# Altium PCB ADCS ARM EUTS.PcbDoc
Units mil, origin at the board's own origin, x right, y up, seen from the top; angles counter-clockwise.
Board outline 3757.87 x 3555.12 mil, 4 copper layers (Top Layer, Ground, Power, Bottom Layer), stack 64.6 mil thick; 56 components, 69 nets, 305 pads, 130 vias.
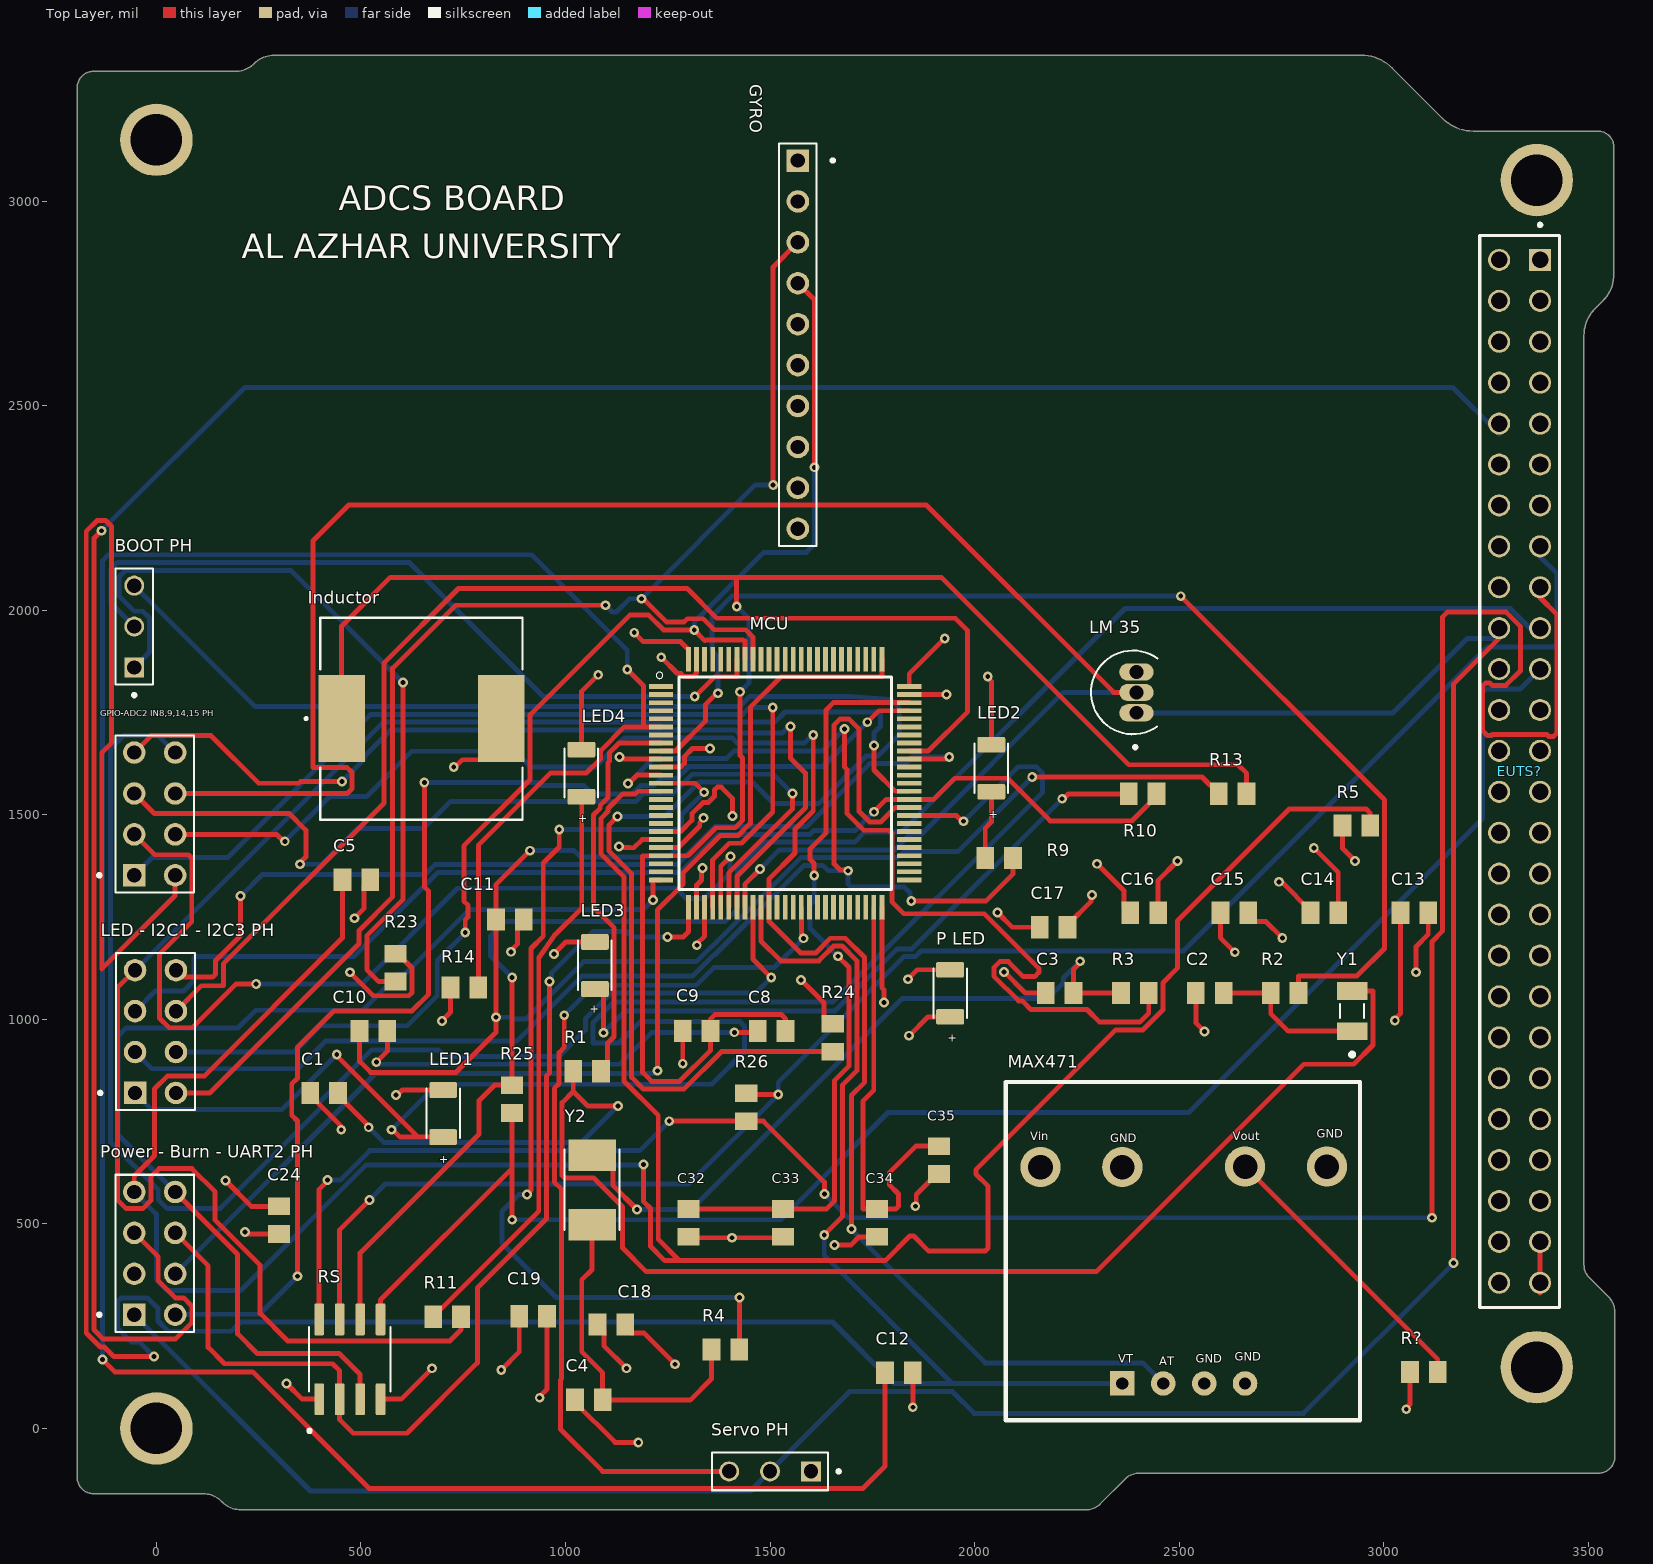
[diagram p0: Top Layer view]
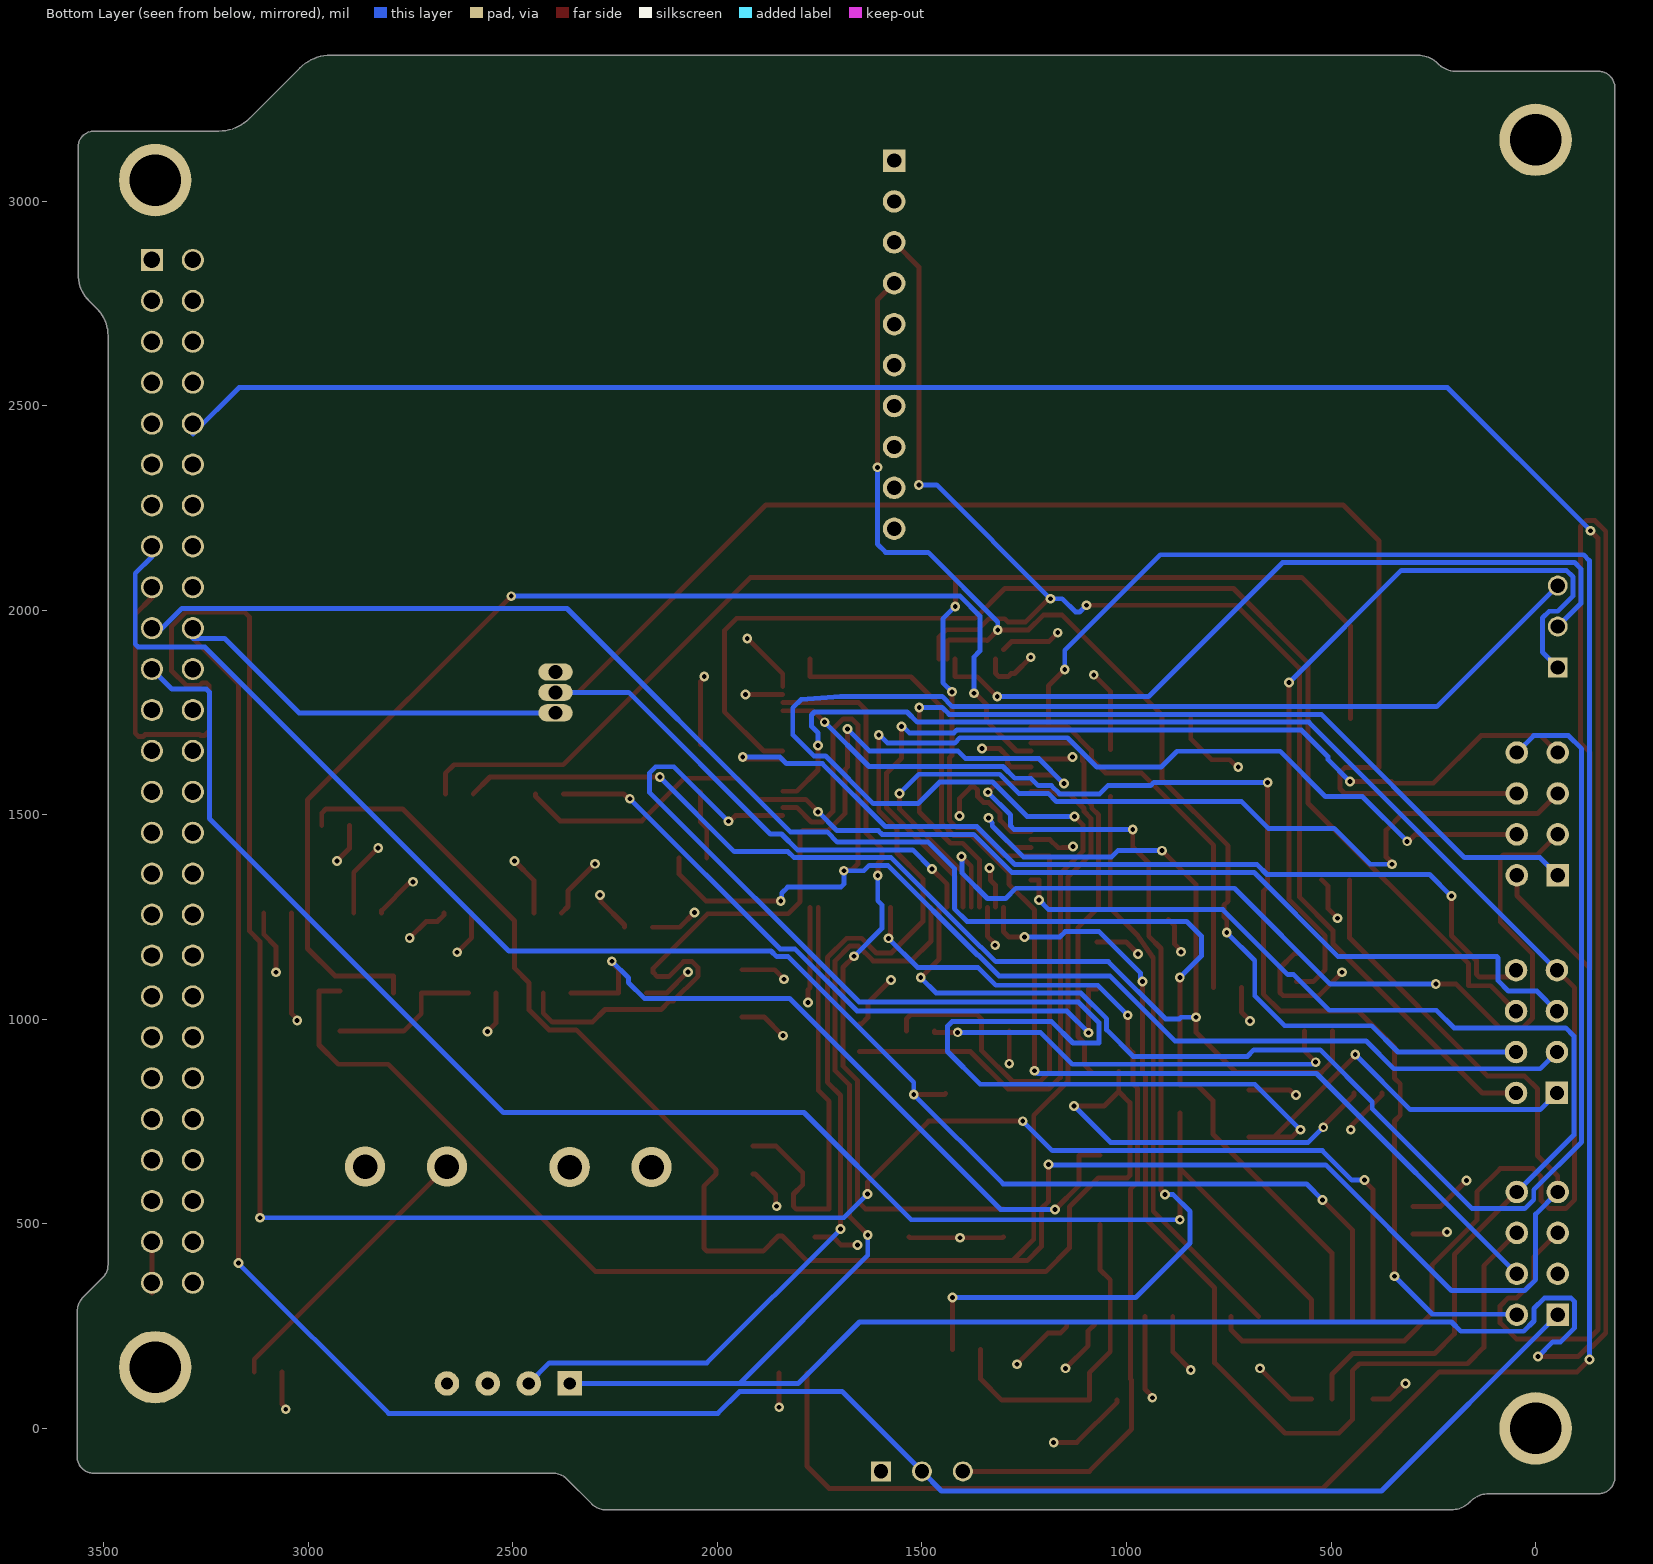
[diagram p1: Bottom Layer view, seen from below]
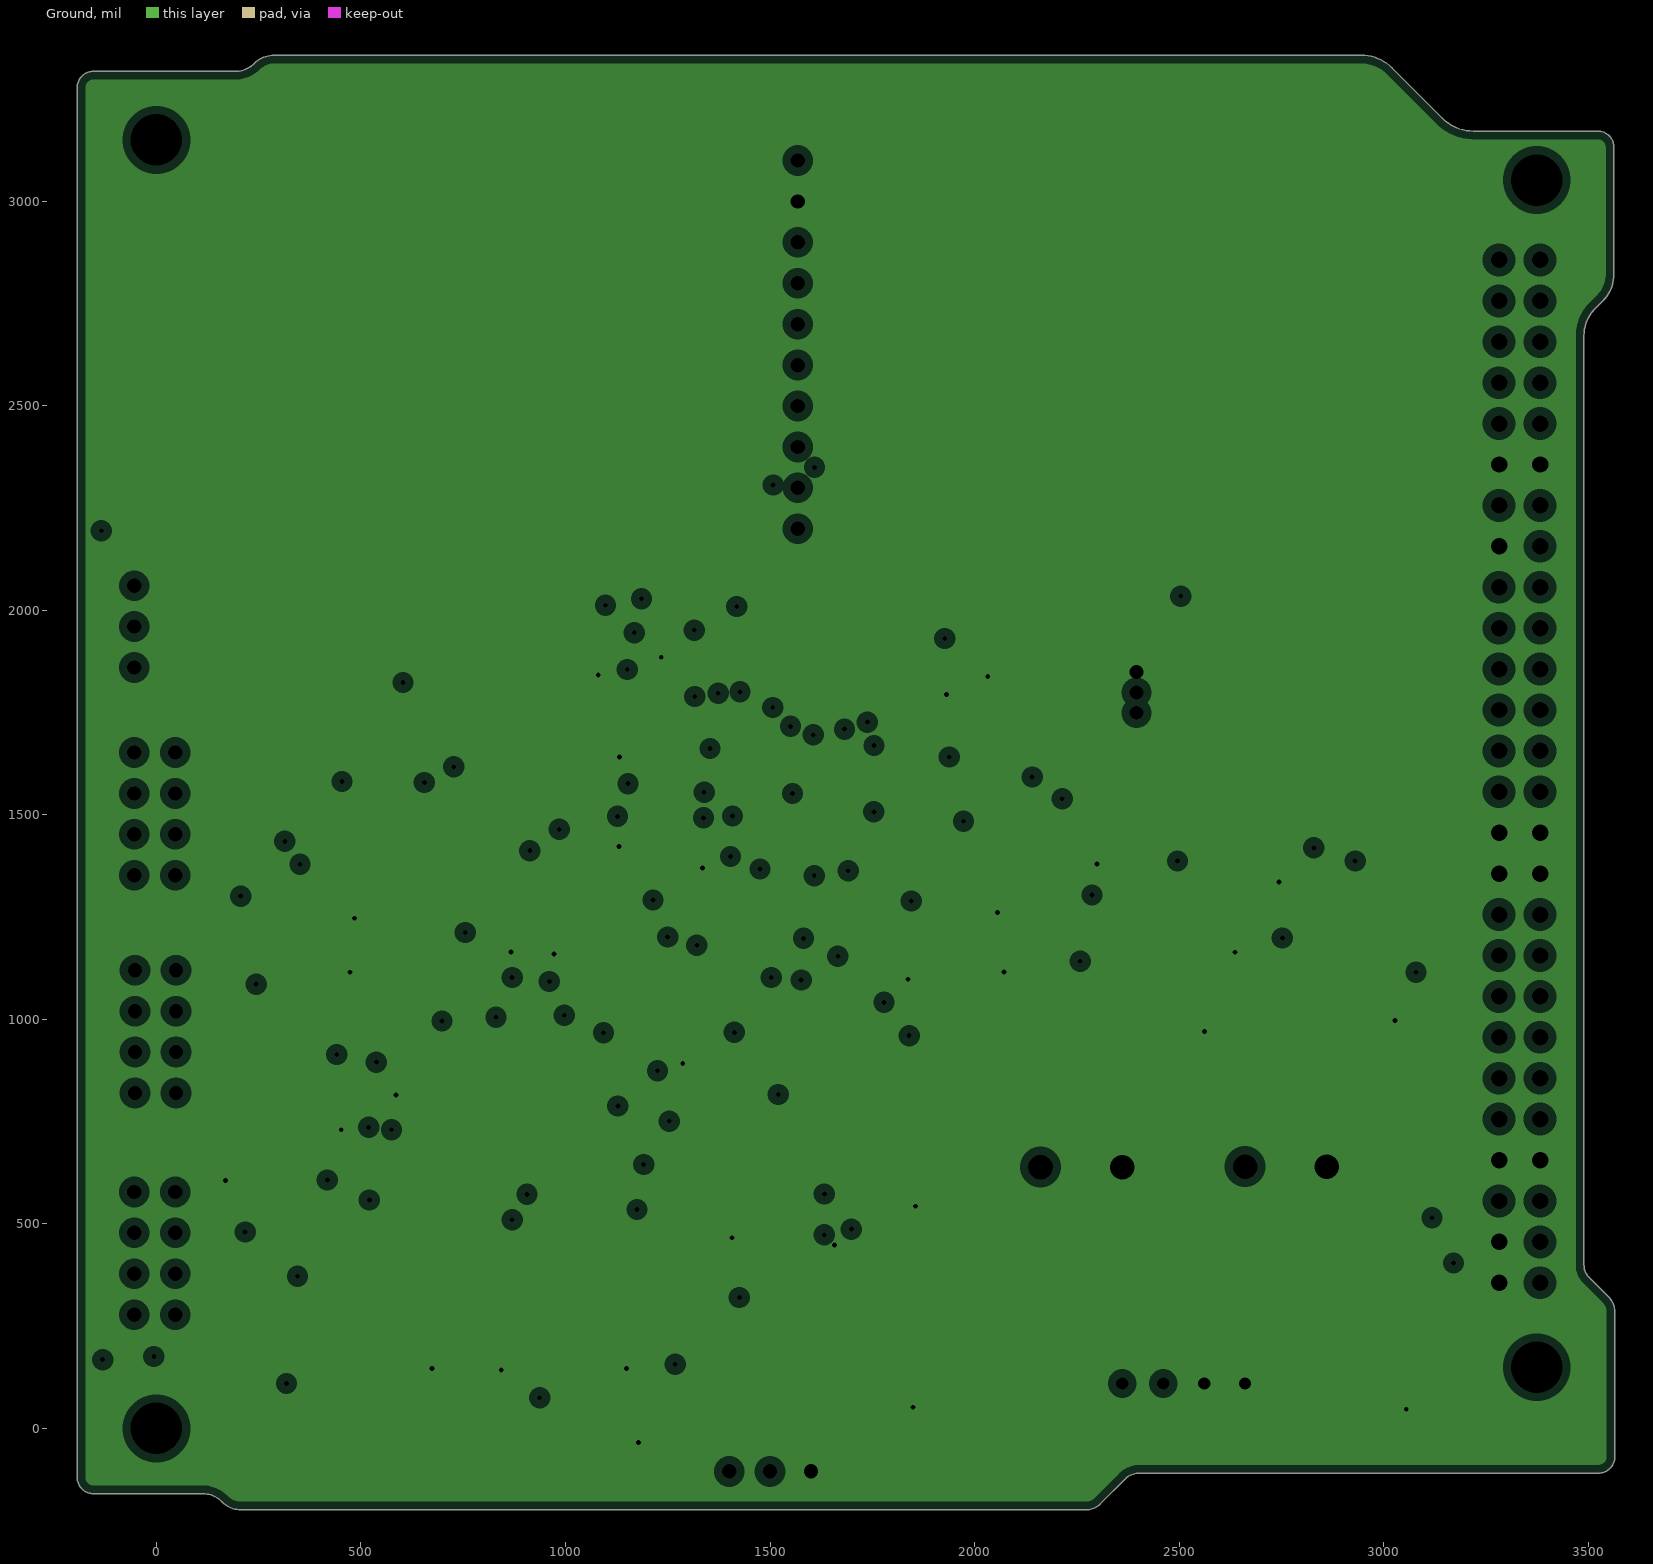
[diagram p2: Ground, clearances drawn from the general rule]
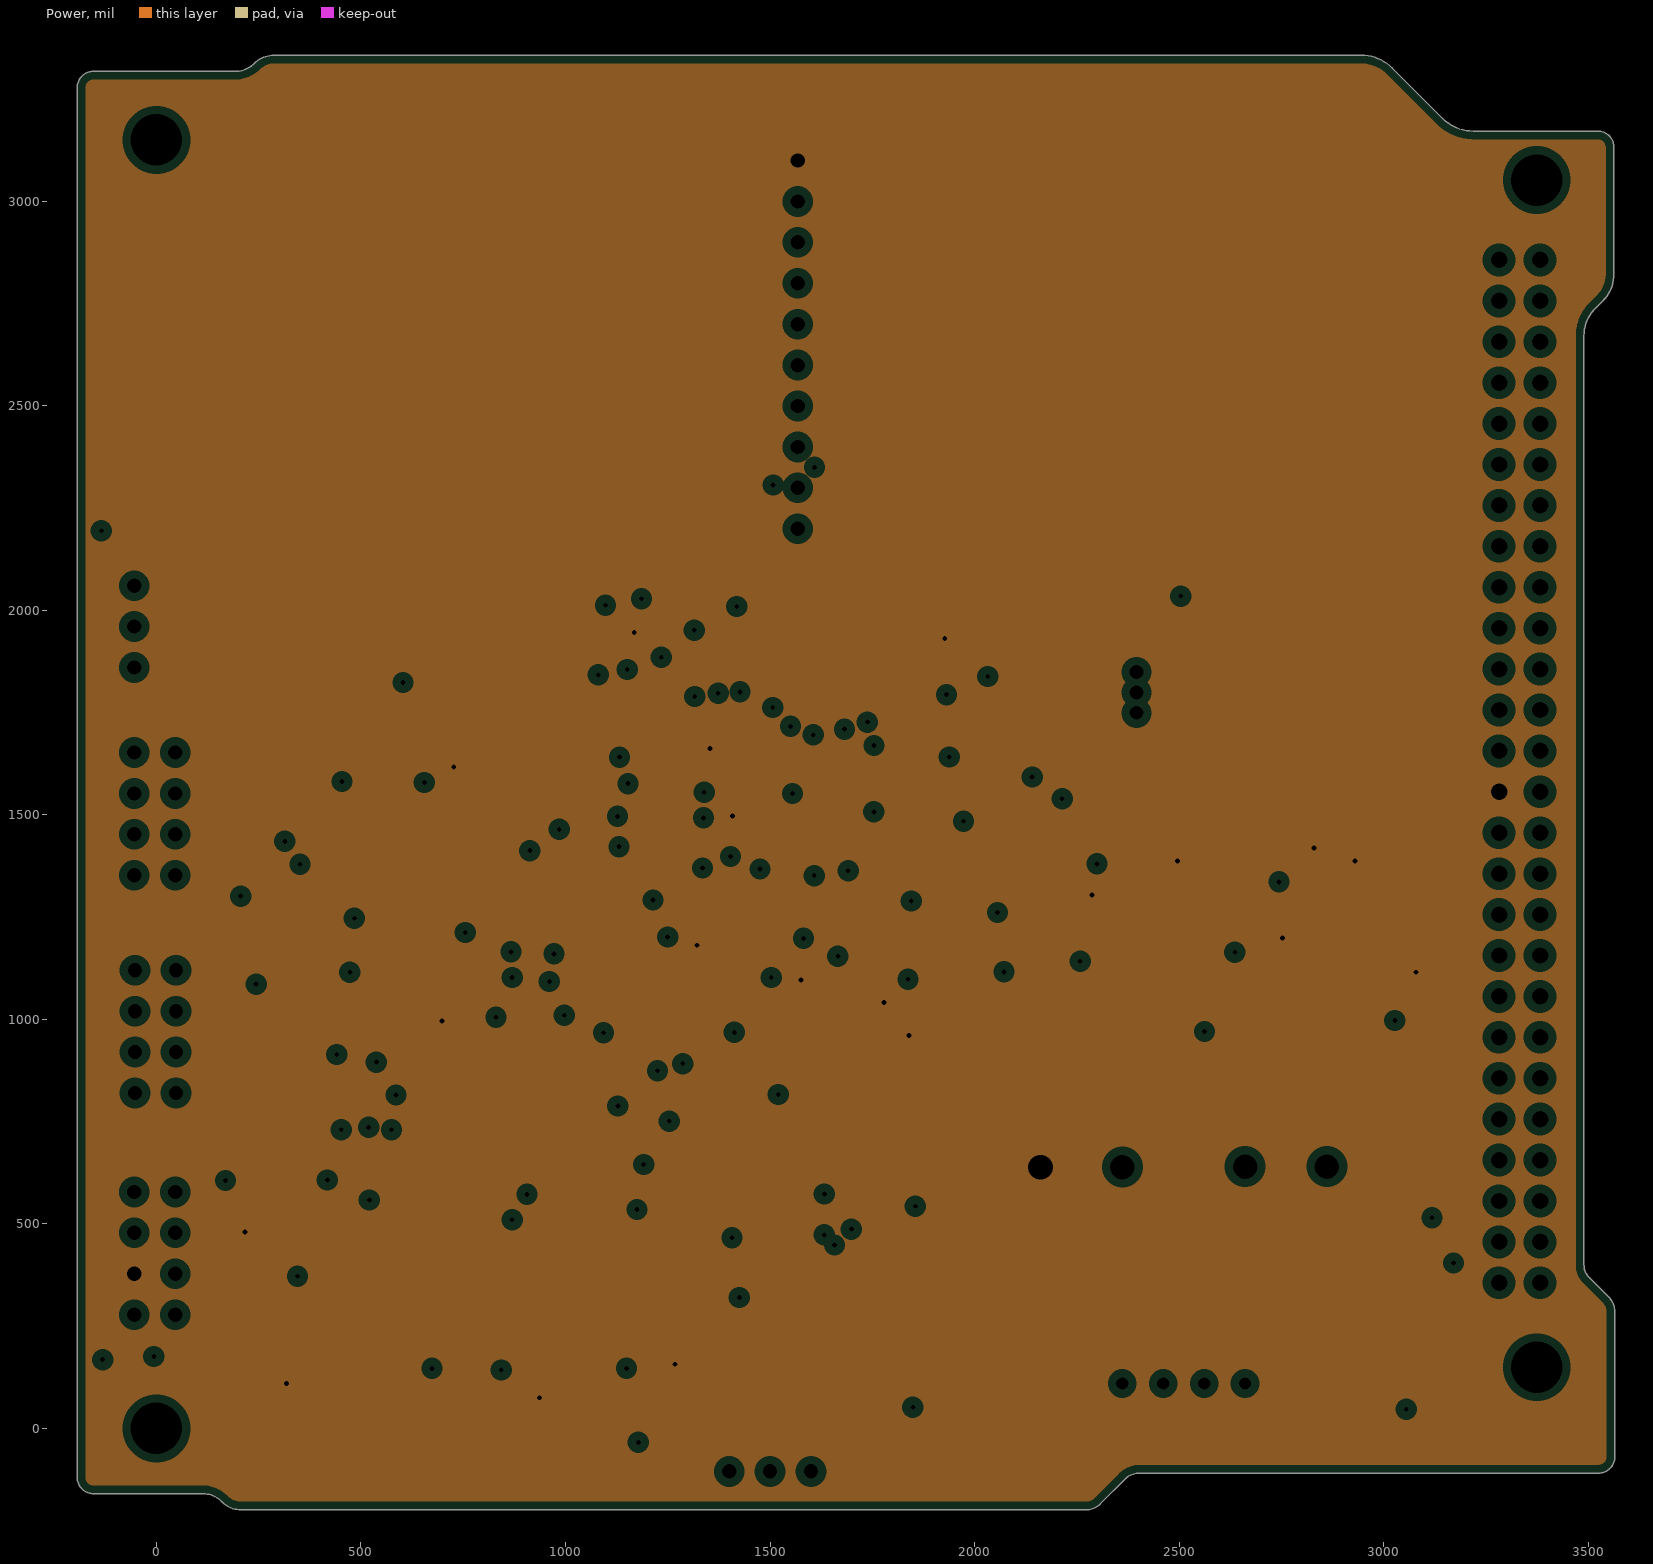
[diagram p3: Power, clearances drawn from the general rule]

## Layer stack, top to bottom
Top Solder: solder mask 0.4, Solder Resist, Dk 3.5
Top Layer: signal copper 1.4
Dielectric 1: prepreg 6.7, FR-4, Dk 4.35
Ground: plane copper 0.7, net G
Dielectric 3: core 47, FR-4, Dk 4.35
Power: plane copper 0.7, net 3.3v (ADCS)
Dielectric 2: prepreg 6.7, FR-4, Dk 4.35
Bottom Layer: signal copper 1.4
Bottom Solder: solder mask 0.4, Solder Resist, Dk 3.5

## Board outline
114.17,-159.45 cw(c114.17,-223.13) 159.2,-178.1 161.27,-180.17 ccw(c206.3,-135.14) 206.3,-198.82 2272.83,-198.82 ccw(c2272.83,-150.82) 2306.78,-184.76 2368.42,-123.11 cw(c2402.36,-157.05) 2402.36,-109.06 3525.2,-109.06 ccw(c3525.2,-69.68) 3564.57,-69.68 3564.57,285.43 ccw(c3513.72,285.43) 3549.67,321.39 3528.54,342.52 3502.04,369.03 cw(c3532.62,399.61) 3489.37,399.61 3489.37,2671.26 cw(c3582.52,2671.26) 3516.65,2737.12 3535.32,2755.79 ccw(c3469.45,2821.65) 3562.6,2821.65 3562.6,3131.5 ccw(c3523.23,3131.5) 3523.23,3170.87 3218.5,3170.87 cw(c3218.5,3276.37) 3143.9,3201.77 3020.27,3325.4 ccw(c2945.67,3250.8) 2945.67,3356.3 287.48,3356.3 ccw(c287.48,3289.09) 239.96,3336.61 cw(c192.44,3384.14) 192.44,3316.93 -153.94,3316.93 ccw(c-153.94,3277.56) -193.31,3277.56 -193.31,-120.08 ccw(c-153.94,-120.08) -153.94,-159.45

## Design rules (kind name [scope] priority, off if disabled: settings)
Clearance [All] p1: gap=7 ignorepadtopadclearanceinfootprint=FALSE except(0: Arc-Hole Track-Hole SMDPad-Hole THPad-Hole Via-Hole Fill-Hole Poly-Hole Region-Hole Text-Hole)
ComponentClearance [All] p1: gap=30 collisioncheckmode=3 verticalgap=30 showdistances=FALSE
DiffPairsRouting [All] p1: maxlimit=10 minlimit=10 mostfreqgap=10 toplayer_minwidth=15 toplayer_maxwidth=15 toplayer_prefwidth=15 bottomlayer_minwidth=15 bottomlayer_maxwidth=15 bottomlayer_prefwidth=15 substack1={0761D619-B0FF-4D42-81BD-1B94FE1A46B2} toplayer_{0761d619-b0ff-4d42-81bd-1b94fe1a46b2}_minwidth=15 toplayer_{0761d619-b0ff-4d42-81bd-1b94fe1a46b2}_maxwidth=15 toplayer_{0761d619-b0ff-4d42-81bd-1b94fe1a46b2}_prefwidth=15 bottomlayer_{0761d619-b0ff-4d42-81bd-1b94fe1a46b2}_minwidth=15 bottomlayer_{0761d619-b0ff-4d42-81bd-1b94fe1a46b2}_maxwidth=15 bottomlayer_{0761d619-b0ff-4d42-81bd-1b94fe1a46b2}_prefwidth=15 maxuncoupledlength=500
HoleSize [All] p1: absolutevalues=TRUE maxlimit=130 minlimit=1 maxpercent=80.000 minpercent=20.000
HoleToHoleClearance [All] p1: gap=6 allowstackedmicrovias=TRUE
MinimumSolderMaskSliver [All] p1: minsoldermaskwidth=3
PlaneClearance [All] p1: clearance=20
PlaneConnect [All] p1: planeconnectstyle=Relief reliefexpansion=20 reliefentries=4 reliefconductorwidth=10 reliefairgap=10
PolygonConnect [All] p1: connectstyle=Relief reliefconductorwidth=10 reliefentries=4 polygonreliefangle="90 Angle" airgapwidth=10
RoutingVias [All] p1: holewidth=12 width=24 viastyle="Through Hole" minholewidth=10 minwidth=10 maxholewidth=12 maxwidth=24
SilkToSilkClearance [All] p1: silktosilkclearance=4
SilkToSolderMaskClearance [IsText] p1: minsilkscreentomaskgap=4 clearancetoexposedcopper=TRUE
SolderMaskExpansion [All] p1: expansion=3 istentingtop=FALSE
Width [All] p1: maxlimit=40 minlimit=10 preferedwidth=12 substack1={0761D619-B0FF-4D42-81BD-1B94FE1A46B2} toplayer_{0761d619-b0ff-4d42-81bd-1b94fe1a46b2}_minwidth=7 bottomlayer_{0761d619-b0ff-4d42-81bd-1b94fe1a46b2}_minwidth=7 minimp=50.000000 maximp=50.000000 favimp=50.000000
21 further rules are at their usual default settings.

## Components (designator, comment, footprint, x,y, rotation, side; value= is the part's Value field where it differs from the comment)
"BOOT PH" "4-103327-5" TE_4-103327-5 -54,1860 r90 top
C1 "6.8pF" CAPC2012X95N 410,820 r0 top
C2 "6.8pf" CAPC2012X95N 2574.69,1064.18 r0 top
C3 "20pF" CAPC2012X95N 2207.69,1064.18 r0 top
C4 "20pf" CAPC2012X95N 1057,70 r0 top
C5 "100nF" CAPC2012X95N 489,1341 r0 top
C8 "100nF" CAPC2012X95N 1503.69,971.18 r0 top
C9 "1uF" CAPC2012X95N 1320.69,971.18 r0 top
C10 "100nF" CAPC2012X95N 530.69,971.18 r0 top
C11 "1uF" CAPC2012X95N 864,1244 r0 top
C12 "1uF" CAPC2012X95N 1815,136 r0 top
C13 "100nF" CAPC2012X95N 3074.69,1260.18 r0 top
C14 "100nF" CAPC2012X95N 2854.69,1260.18 r0 top
C15 "100nF" CAPC2012X95N 2634.69,1260.18 r0 top
C16 "100nF" CAPC2012X95N 2414.69,1260.18 r0 top
C17 "100nF" CAPC2012X95N 2193,1225 r0 top
C18 "100nF" CAPC2012X95N 1112.02,254 r0 top
C19 "100nF" CAPC2012X95N 921,274 r0 top
C24 "100nF" CAPC2012X95N 300,509 r90 top
C32 "1uF" CAPC2012X95N 1300.69,502.18 r90 top
C33 "1uF" CAPC2012X95N 1531.69,502.18 r90 top
C34 "1uF" CAPC2012X95N 1761.69,502.18 r90 top
C35 "1uF" CAPC2012X95N 1913,656 r90 top
EUTS? "ESQ-126-39-G-D" SAMTEC_ESQ-126-39-G-D 3382,2856 r90 top locked
"GPIO-ADC2 IN8,9,14,15 PH" "5-146256-4" TE_5-146256-4 -4,1502 r90 top
GYRO "6-146278-0" TE_6-146278-0 1568,2649 r270 top (schematic designator Gyro)
Inductor "CDRH127/LDNP-470MC" IND_CDRH127/LDNP-470MC_SUM 648,1735 r0 top
LED1 "BLUE-LED" RESC3015X65 701,770 r90 top
LED2 "RED-LED" RESC3015X65 2041,1614 r90 top
LED3 "GREEN-LED" RESC3015X65 1072,1132 r90 top
LED4 "ORANGE-LED" RESC3015X65 1039,1602 r90 top
"LED - I2C1 - I2C3 PH" "5-146256-4" TE_5-146256-4 -2,970 r90 top
"LM 35" "LM35DZ/NOPB" TO92127P521H735-3 2365,1799 r90 top
MAX471 "MAX471?" PCBComponent_1 2361,255 r0 top
MCU "STM32F427VGT7" QFP50P1600X1600X160-100N 1537,1577 r0 top
"P LED" "BLUE-LED" RESC3015X65 1940,1064 r90 top
"Power - Burn - UART2 PH" "5-146256-4" TE_5-146256-4 -4,428 r90 top
R1 "0" CAPC2012X95N 1053,873 r0 top
R2 "0" CAPC2012X95N 2757.69,1064.18 r0 top
R3 "0" CAPC2012X95N 2391.69,1064.18 r0 top
R4 "0" CAPC2012X95N 1391,193 r0 top
R5 "10K" CAPC2012X95N 2933,1474 r0 top
R9 "22" CAPC2012X95N 2060,1394 r0 top
R10 "22" CAPC2012X95N 2410.69,1551.18 r0 top
R11 "22" CAPC2012X95N 710.69,273.18 r0 top
R13 "0" CAPC2012X95N 2630.69,1551.18 r0 top
R14 "0" CAPC2012X95N 753,1078 r0 top
R23 "10k" CAPC2012X95N 584.69,1126.18 r90 top
R24 "10k" CAPC2012X95N 1653,955 r90 top
R25 "100" CAPC2012X95N 869,805 r90 top
R26 "100" CAPC2012X95N 1442,785 r90 top
R? "330" CAPC2012X95N 3098,138 r0 top
RS "MAX488ESA+" SOIC127P600X175-8N 473,169 r90 top
"Servo PH" "4-103327-5" TE_4-103327-5 1600,-105 r180 top
Y1 "32.768kHz" XTAL_ECS-.327-12.5-34S-TR 2922.69,1020.18 r90 top
Y2 "8MHZ" XTAL500X320X130N 1065,583 r90 top

## Footprints (in the part's own frame and the unit in brackets; to place one, negate y for a bottom-side part, rotate by r counter-clockwise, add the part's x,y. Pads: shape width x height; smd on the part's side, far side on the other; paste and mask are expansions set on the pad)
CAPC2012X95N [mm]
  rect 1.1x1.38 smd: 1(-0.863,0) 2(0.863,0)
IND_CDRH127/LDNP-470MC_SUM [mil]
  rect 114x213 smd: 1(-195,0) 2(195,0)
  silkscreen extent -285,-247 247,247
PCBComponent_1 [mil]
  rect 60x60 hole 30: 1(0,-145)
  round 60 hole 30: 2(100,-145) 3(200,-145) 4(300,-145)
  round 98.43 hole 60: 5(500,385) 6(300,385) 7(0,383.86) 8(-200,383.86)
  silkscreen extent -285,-235 581,592
QFP50P1600X1600X160-100N [mm]
  rect 1.5x0.3 smd mask+0.049: 1(-7.7,6) 2(-7.7,5.5) 3(-7.7,5) 4(-7.7,4.5) 5(-7.7,4) 6(-7.7,3.5) 7(-7.7,3) 8(-7.7,2.5) 9(-7.7,2) 10(-7.7,1.5) 11(-7.7,1) 12(-7.7,0.5) 13(-7.7,0) 14(-7.7,-0.5) 15(-7.7,-1) 16(-7.7,-1.5) 17(-7.7,-2) 18(-7.7,-2.5) 19(-7.7,-3) 20(-7.7,-3.5) 21(-7.7,-4) 22(-7.7,-4.5) 23(-7.7,-5) 24(-7.7,-5.5) 25(-7.7,-6) 51(7.7,-6) 52(7.7,-5.5) 53(7.7,-5) 54(7.7,-4.5) 55(7.7,-4) 56(7.7,-3.5) 57(7.7,-3) 58(7.7,-2.5) 59(7.7,-2) 60(7.7,-1.5) 61(7.7,-1) 62(7.7,-0.5) 63(7.7,0) 64(7.7,0.5) 65(7.7,1) 66(7.7,1.5) 67(7.7,2) 68(7.7,2.5) 69(7.7,3) 70(7.7,3.5) 71(7.7,4) 72(7.7,4.5) 73(7.7,5) 74(7.7,5.5) 75(7.7,6)
  rect 0.3x1.5 smd mask+0.049: 26(-6,-7.7) 27(-5.5,-7.7) 28(-5,-7.7) 29(-4.5,-7.7) 30(-4,-7.7) 31(-3.5,-7.7) 32(-3,-7.7) 33(-2.5,-7.7) 34(-2,-7.7) 35(-1.5,-7.7) 36(-1,-7.7) 37(-0.5,-7.7) 38(0,-7.7) 39(0.5,-7.7) 40(1,-7.7) 41(1.5,-7.7) 42(2,-7.7) 43(2.5,-7.7) 44(3,-7.7) 45(3.5,-7.7) 46(4,-7.7) 47(4.5,-7.7) 48(5,-7.7) 49(5.5,-7.7) 50(6,-7.7) 76(6,7.7) 77(5.5,7.7) 78(5,7.7) 79(4.5,7.7) 80(4,7.7) 81(3.5,7.7) 82(3,7.7) 83(2.5,7.7) 84(2,7.7) 85(1.5,7.7) 86(1,7.7) 87(0.5,7.7) 88(0,7.7) 89(-0.5,7.7) 90(-1,7.7) 91(-1.5,7.7) 92(-2,7.7) 93(-2.5,7.7) 94(-3,7.7) 95(-3.5,7.7) 96(-4,7.7) 97(-4.5,7.7) 98(-5,7.7) 99(-5.5,7.7) 100(-6,7.7)
  silkscreen extent -8,-6.6 6.6,6.9
RESC3015X65 [mm]
  rrect20% 0.98x1.72 smd: 1(-1.47,0) 2(1.45,0)
  silkscreen extent -1.53,-1.04 1.53,1.04
SAMTEC_ESQ-126-39-G-D [mm]
  rect 1.37x1.37 hole 1.02: 01(0,0)
  round 1.37 hole 1.02: 02(0,2.54) 03(-2.54,0) 04(-2.54,2.54) 05(-5.08,0) 06(-5.08,2.54) 07(-7.62,0) 08(-7.62,2.54) 09(-10.16,0) 10(-10.16,2.54) 11(-12.7,0) 12(-12.7,2.54) 13(-15.24,0) 14(-15.24,2.54) 15(-17.78,0) 16(-17.78,2.54) 17(-20.32,0) 18(-20.32,2.54) 19(-22.86,0) 20(-22.86,2.54) 21(-25.4,0) 22(-25.4,2.54) 23(-27.94,0) 24(-27.94,2.54) 25(-30.48,0) 26(-30.48,2.54) 27(-33.02,0) 28(-33.02,2.54) 29(-35.56,0) 30(-35.56,2.54) 31(-38.1,0) 32(-38.1,2.54) 33(-40.64,0) 34(-40.64,2.54) 35(-43.18,0) 36(-43.18,2.54) 37(-45.72,0) 38(-45.72,2.54) 39(-48.26,0) 40(-48.26,2.54) 41(-50.8,0) 42(-50.8,2.54) 43(-53.34,0) 44(-53.34,2.54) 45(-55.88,0) 46(-55.88,2.54) 47(-58.42,0) 48(-58.42,2.54) 49(-60.96,0) 50(-60.96,2.54) 51(-63.5,0) 52(-63.5,2.54)
  silkscreen extent -65.02,-1.2 2.27,3.75
SOIC127P600X175-8N [mm]
  rrect25% 1.97x0.6 smd: 1(-2.475,1.905) 2(-2.475,0.635) 3(-2.475,-0.635) 4(-2.475,-1.905) 5(2.475,-1.905) 6(2.475,-0.635) 7(2.475,0.635) 8(2.475,1.905)
  silkscreen extent -4.54,-2.52 2,2.6
TE_4-103327-5 [mm]
  rect 1.24x1.24 hole 0.89: 1(0,0)
  round 1.24 hole 0.89: 2(2.54,0) 3(5.08,0)
  silkscreen extent -1.82,-1.17 6.15,1.17
TE_5-146256-4 [mil]
  rect 55.04x55.04 hole 35.04: 1(-150,50)
  round 55.04 hole 35.04: 2(-50,50) 3(50,50) 4(150,50) 5(-150,-50) 6(-50,-50) 7(50,-50) 8(150,-50)
  silkscreen extent -192,-96 192,139
TE_6-146278-0 [mil]
  rect 55.04x55.04 hole 35.04: 1(-450,0)
  round 55.04 hole 35.04: 2(-350,0) 3(-250,0) 4(-150,0) 5(-50,0) 6(50,0) 7(150,0) 8(250,0) 9(350,0) 10(450,0)
  silkscreen extent -492,-46 492,89, body extent -492,-230 492,210, height 46
TO92127P521H735-3 [mm]
  oval 1.07x2.14 hole 0.85 mask+0.051: 1(-1.27,-0.775) 2(0,-0.775) 3(1.27,-0.775)
  silkscreen extent -3.5,-2.08 2.6,2.04, body extent -2.4,-1.53 2.4,2.4, height 8
XTAL500X320X130N [mm]
  rect 1.95x2.95 smd: 1(-2.15,0) 2(2.15,0)
  silkscreen extent -2.5,-1.7 2.5,1.7
XTAL_ECS-.327-12.5-34S-TR [mm]
  rect 1.1x1.9 smd: 1(-1.25,0) 2(1.25,0)
  silkscreen extent -2.8,-0.75 0.44,0.75

## Part data
"BOOT PH" "Servo PH": "Conn Unshrouded Header HDR 3 POS 2.54mm Solder ST Thru-Hole Carton", Package=None, Availability=Unavailable, EU_RoHS_Compliance=Compliant, MF="TE Connectivity", MP=4-103327-5, Price=None, SnapEDA_Link=https://www.snapeda.com/parts/4-103327-5/TE%20Connectivity%20AMP%20Connectors/view-part/2403997/?ref=snap, TE_purchase_URL=https://www.te.com/usa-en/product-4-103327-5.html?te_bu=Cor&te_type=disp&te_campaign=seda_glo_cor-seda-global-disp-prtnr-fy19-seda-model-bom-cta_sma-317_1&elqCampaignId=32493
C1 C2 C3 C4 C5 C8 C9 C10 C11 C12 C13 C14 C15 C16 C17 C18 C19 C24 C32 C33 C34 C35: library part UMK212SD103KD-T, "CAP CER 10000PF 50V 0805", Package=None, Availability=Unavailable, MP=UMK212SD103KD-T, Price=None
EUTS?: "52 Position Elevated Socket Connector Through Hole", Package=None, Availability=Unavailable, MF=Samtec, MP=ESQ-126-39-G-D, Price=None, SnapEDA_Link=https://www.snapeda.com/parts/ESQ-126-39-G-D/Samtec%20Inc./view-part/490181/?ref=snap
"GPIO-ADC2 IN8,9,14,15 PH" "LED - I2C1 - I2C3 PH" "Power - Burn - UART2 PH": "08 MODII HDR DRST B/A .100CL LF", Package=None, Availability=Unavailable, MF="TE Connectivity", MP=5-146256-4, Price=None, SnapEDA_Link=https://www.snapeda.com/parts/5-146256-4/TE%20Connectivity%20AMP%20Connectors/view-part/500529/?ref=snap
GYRO: "10 MODII HDR SRST B/A .100CL", Package=None, Availability=Warning, Centerline_Pitch="2.54 mm[.1 in]", Check_prices=https://www.snapeda.com/parts/6-146278-0/TE%20Connectivity/view-part/1405716/?ref=eda, EU_RoHS_Compliance=Compliant, MF="TE Connectivity", MP=6-146278-0, Number_of_Positions=10, Price=None, Product_Type=Connector, Purchase-URL=https://pricing.snapeda.com/search/part/6-146278-0/?ref=eda, SnapEDA_Link=https://www.snapeda.com/parts/6-146278-0/TE%20Connectivity/view-part/1405716/?ref=snap
Inductor: "47ÂµH Shielded Inductor 3.25A 78mOhm Max Nonstandard", Package="Nonstandard Sumida", Check_prices=https://www.snapeda.com/parts/CDRH127/LDNP-470MC/Sumida%20America%20Components%20Inc./view-part/547921/?ref=eda, Digi-Key_Part_Number=308-1339-1-ND, MF="Sumida America", MP=CDRH127/LDNP-470MC, Purchase-URL=https://pricing.snapeda.com/search/part/CDRH127/LDNP-470MC/?ref=eda, SnapEDA_Link=https://www.snapeda.com/parts/CDRH127/LDNP-470MC/Sumida%20America%20Components%20Inc./view-part/547921/?ref=snap
LED1 LED2 LED3 LED4 "P LED": library part LTST-C150TBKT, "LED Blue 470nm LED Indication 3.3V"
"LM 35": "Temperature Sensor Analog, Local 0Â°C ~ 100Â°C 10mV/Â°C TO-92-3", Package="E-PKG AXIAL-LEADED-2 ON Semiconductor", Availability="Not in stock", Check_prices=https://www.snapeda.com/parts/LM35DZ/Texas+Instruments/view-part/?ref=eda, MF="Texas Instruments", MP=LM35DZ, Price=None, SnapEDA_Link=https://www.snapeda.com/parts/LM35DZ/Texas+Instruments/view-part/?ref=snap
MAX471: "MAX471 Voltage And Current Sensor Module Consume Voltage Load Detection Module"
MCU: "ARMÂ® CortexÂ®-M4 STM32F4 Microcontroller IC 32-Bit 180MHz 1MB _1M x 8_ FLASH 100-LQFP _14x14_", Package="LQFP-100 STMicroelectronics", Availability=Unavailable, MF=STMicroelectronics, MP=STM32F427VGT7, Price=None, SnapEDA_Link=https://www.snapeda.com/parts/STM32F427VGT7/STMicroelectronics/view-part/567621/?ref=snap
R1 R2 R3 R4 R5 R9 R10 R11 R13 R14 R23 R24 R25 R26 R?: library part RESISTOR
RS: "1/1 Transceiver Full RS422, RS485 8-SOIC", Package="SOIC-8 Maxim", Availability=Unavailable, MF="Maxim Integrated", MP=MAX488ESA+T, Price=None, SnapEDA_Link=https://www.snapeda.com/parts/MAX488ESA+T/Maxim%20Integrated/view-part/48834/?ref=snap
Y1: library part ECS-.327-12.5-34S-TR, "32.768kHz Â±20ppm Crystal 12.5pF 70 kOhms 2-SMD, No Lead", Package="SMD-2 ECS International", Availability=Unavailable, MF="ECS Inc.", MP=ECS-.327-12.5-34S-TR, Price=None, SnapEDA_Link=https://www.snapeda.com/parts/ECS-.327-12.5-34S-TR/ECS%20Inc./view-part/2454548/?ref=snap
Y2: library part ABM3-8.000MHZ-D2Y-T, "8MHz Â±20ppm Crystal 18pF 140 Ohms 2-SMD, No Lead", Package="SMD-2 Abracon", Digi-Key_Part_Number=535-10630-1-ND, Digi-Key_Purchase_URL=https://www.digikey.com/product-detail/en/abracon-llc/ABM3-8.000MHZ-D2Y-T/535-10630-1-ND/2344632?utm_source=snapeda&utm_medium=aggregator&utm_campaign=symbol, MF=Abracon, MP=ABM3-8.000MHZ-D2Y-T, SnapEDA_Link=https://www.snapeda.com/parts/ABM3-8.000MHZ-D2Y-T/Abracon%20LLC/view-part/106372/?ref=snap

## Free pads (board coordinates)
  round 177.17 hole 125.98 unplated: 1(0,0) 2(0,3149.61) 3(3374.01,3051.18) 4(3374.01,149.61)

## Via types
v1: diameter 24, hole 12, Top Layer to Bottom Layer, 130 vias

## Nets (pads, with @x,y where several pads share a name; then routed paths per layer and width w, separated by ;. In a path a pad name is that pad's centre, name@x,y a point inside that pad or via, vN(x,y) a via of type N, cw(c..) or ccw(c..) an arc to the next point about the centre after c; other vN are vias at no path point)
3.3V: "Power - Burn - UART2 PH.3" EUTS?.10 | length 6123.5
  Top Layer w12: v1(-134.31,2194.18) -152.31,2176.18 -152.31,241.18 -129.31,218.18 46.69,218.18 86.69,258.18 86.69,299.18 66.69,319.18 46.69,319.18 4.69,361.18 4.69,419.31 -54,478
  Bottom Layer w12: v1(-134.31,2194.18) 215.69,2544.18 3168.82,2544.18 EUTS?.10@3282,2431
"3.3v (ADCS)": "P LED.1" "Power - Burn - UART2 PH.2" C13.2 C14.2 C15.2 C16.2 C17.2 C18.2 C19.2 C24.1 EUTS?.28 GYRO.1 Inductor.2 MAX471.8 MCU.11 MCU.19 MCU.28 MCU.50 MCU.75 MCU.100 R5.1 R14.1 R24.2 RS.1 | length 2980.7
  Top Layer w12: v1(217,480) 220.25,480 225.22,475.02 C24.1 ; v1(318,110) 356.44,71.56 RS.1 ; v1(698,996) 698,996.38 719.02,1017.4 R14.1 ; v1(727,1617) 730.25,1617 747.75,1634.5 792,1634.5 843,1685.5 Inductor.2 ; v1(937,75) 937,78.25 954.98,96.22 C19.2 ; C18.2 1146,248.49 1161.65,232.83 1192.17,232.83 v1(1268,157) ; v1(1168,1945) 1189.81,1923.19 1281.17,1923.19 MCU.100@1300.68,1903.68 ; MCU.19 1281.38,1458.89 1308.83,1486.34 1308.83,1502.55 1336.28,1530 1349.36,1530 1364,1544.64 1364,1560.36 1371.03,1567.38 1380.97,1567.38 1408,1540.36 v1(1408,1497) ; MCU.11 1281.38,1616.37 1290.48,1625.47 1290.48,1641.93 1310.55,1662 v1(1353,1662) ; v1(1321,1181) 1321,1184.25 1340.15,1203.4 MCU.28 ; v1(1576,1096) 1631.84,1040.16 1631.84,1004.63 1647.49,988.98 R24.2 ; MCU.50 1773.22,1077.38 1778.53,1072.06 v1(1778.53,1041.38) ; v1(1840,960) 1886.13,1006.13 1940,1006.13 ; MCU.75 1840.15,1844.15 v1(1927,1931) ; C17.2 2226.98,1230.51 2284.7,1288.24 2284.7,1301.7 v1(2287,1304) ; C16.2 2448.67,1339.67 v1(2496,1387) ; C15.2 2668.67,1254.67 2684.32,1239.02 2711.98,1239.02 v1(2752,1199) ; v1(2829,1419) 2888.67,1359.33 C14.2 ; R5.1 2899.02,1417.98 v1(2930,1387) ; v1(3079,1115) 3079,1177.86 3108.67,1207.53 C13.2
"3.3V (COMM)": EUTS?.18
"3.3V (EPS)": EUTS?.08
"3.3V (OBC)": EUTS?.22
5V: "LM 35.1" "Power - Burn - UART2 PH.1" "Servo PH.2" EUTS?.20 | length 6212.7
  Top Layer w12: v1(3170.69,404.18) 3170.69,1819.69 EUTS?.20@3282,1931
  Bottom Layer w12: -54,278 376.82,-152.82 1452.18,-152.82 1500,-105 1695.18,90.18 1945.69,90.18 1998.87,37 2803.51,37 v1(3170.69,404.18) ; 2395.51,1749 3022.57,1749 3204.57,1931 EUTS?.20@3282,1931
5V(CAMERA): EUTS?.06
BOOT0: "BOOT PH.2" MCU.94 | length 1898.7
  Top Layer w12: v1(1316,1789.23) 1317.16,1789.23 1365.11,1837.18 1418.89,1837.18 MCU.94
  Bottom Layer w12: -54,1960 -110.41,2016.41 -110.41,2101.18 -95.18,2116.41 618.46,2116.41 945.87,1789 1315.77,1789 v1(1316,1789.23)
"E-RST Hard Reset": EUTS?.42
G: "LM 35.3" "P LED.2" "Servo PH.1" C1.1 C2.1 C3.1 C4.1 C5.2 C9.1 C11.2 C12.2 C13.1 C14.1 C15.1 C16.1 C17.1 C18.1 C19.1 C24.2 C32.1 C33.1 C34.1 C35.1 EUTS?.11 EUTS?.12 EUTS?.16 EUTS?.29 EUTS?.30 EUTS?.31 EUTS?.32 EUTS?.45 EUTS?.46 EUTS?.50 EUTS?.52 GYRO.2 LED1.2 LED2.2 LED3.2 LED4.2 MAX471.3 MAX471.4 MAX471.5 MAX471.7 MCU.10 MCU.20 MCU.27 MCU.74 MCU.99 R23.2 R?.1 RS.4 | length 4385.1
  Top Layer w12: v1(169,606) 232.02,542.98 C24.2 ; C1.1 376.02,814.49 449.7,740.81 449.7,732.3 v1(452,730) ; v1(473,1115) 530.45,1057.55 617.24,1057.55 624.86,1065.17 624.86,1125.5 590.2,1160.16 R23.2 ; v1(484,1247) 507.32,1270.32 507.32,1325.35 C5.2 ; RS.4 598.56,71.56 v1(674,147) ; v1(586,815) 589.25,815 601.33,827.09 LED1.2 ; v1(843,143) 887.02,187.02 C19.1 ; v1(867,1165) 867,1168.25 882.32,1183.57 882.32,1228.35 C11.2 ; v1(971.91,1159.98) 1001.02,1189.09 LED3.2 ; C4.1 1023.02,64.49 1121.51,-34 v1(1178,-34) ; LED4.2 1039,1801 v1(1080,1842) ; C18.1 1093.7,238.35 1093.7,202.3 v1(1149,147) ; v1(1131,1422) 1133.3,1419.7 1156.88,1419.7 1157.38,1419.21 1167.32,1419.21 1187.32,1439.21 MCU.20 ; v1(1132.16,1640.84) 1135.41,1640.84 1140.19,1636.06 MCU.10 ; v1(1234,1885) 1273.76,1845.24 1281.87,1845.24 1289.49,1837.62 1312.07,1837.62 1320.37,1845.92 1320.37,1880.05 MCU.99 ; v1(1286.72,891.58) C9.1 ; C32.1 1302.9,466 v1(1407,466) 1529.49,466 C33.1 ; MCU.27 1320.46,1328.22 1332.54,1340.29 1332.54,1367.69 v1(1334.83,1369.99) ; v1(1657.53,448.21) 1697.53,448.21 1717.53,468.21 C34.1 ; v1(1837,1098) 1860.09,1121.09 1940,1121.09 ; MCU.74 v1(1931,1793.54) ; v1(1848.98,51.83) C12.2 ; v1(1855,543) 1857.3,545.3 1857.3,571.83 1907.49,622.02 C35.1 ; v1(2032,1838) 2032,1834.75 2041,1825.75 LED2.2 ; v1(2056,1261) 2092,1225 C17.1 ; v1(2072,1116) 2123.82,1064.18 C3.1 ; v1(2299,1380) 2365.06,1313.94 2365.06,1275.83 C16.1 ; C2.1 2540.72,991.28 v1(2562,970) ; C15.1 2600.72,1199.28 v1(2636,1164) ; v1(2744,1336) 2746.3,1333.7 2752.71,1333.7 2820.72,1265.69 C14.1 ; v1(3027,997) 3027,1000.25 3040.72,1013.96 C13.1 ; v1(3055,47) 3055,50.25 3064.02,59.27 R?.1
"NetBOOT PH_1": "BOOT PH.1" R23.1 | length 1914.9
  Top Layer w12: R23.1 543.67,1092.21 514.69,1121.18 514.69,1204.18 602.69,1292.18 v1(602.69,1823.18)
  Bottom Layer w12: -54,1860 -16.59,1897.41 -16.59,1981.18 -32.82,1997.41 -54,1997.41 -91.41,2034.82 -91.41,2081.18 -75.18,2097.41 328.46,2097.41 v1(602.69,1823.18)
"NetBOOT PH_3": "BOOT PH.3" R24.1 | length 4102.9
  Top Layer w12: v1(1127,1496) 1127,1495.57 1106,1474.57 1106,1411.64 1161.69,1355.95 1161.69,858.22 1190.73,829.18 1289.37,829.18 1381.22,921.02 R24.1
  Bottom Layer w12: -54,2060 241.77,1764.23 1425.7,1764.23 1450.65,1789.18 1699.69,1789.18 1795.69,1781.18 1815.69,1761.18 1815.69,1695.34 1764.36,1644 1735.64,1644 1618.82,1527.18 1509.64,1527.18 1456.82,1580 1327.16,1580 1243.16,1496 v1(1127,1496)
NetC1_2: C1.2 R1.1 Y1.2 | length 3716.6
  Top Layer w12: C1.2 443.98,814.49 516.7,741.76 516.7,738.3 v1(519,736) ; R1.1 1019.02,823.68 ; v1(1128,788) 1054.71,788 1019.02,823.68 ; Y1.2 2973.69,1069.39 2973.69,937.18 2926.69,890.18 2804.69,890.18 2297.69,383.18 1197.69,383.18 1139.69,441.18 1139.69,541.18 1068.49,612.39 997.49,612.39 991.69,618.18 991.69,796.35 1019.02,823.68
  Bottom Layer w12: v1(519,736) 555.82,699.18 1039.18,699.18 v1(1128,788)
NetC2_2: C2.2 R2.1 Y1.1 | length 382.1
  Top Layer w12: C2.2 R2.1 2723.72,1013.95 2766.69,970.97 Y1.1
NetC3_2: C3.2 R3.1 Y2.2 | length 1749.6
  Top Layer w12: Y2.2 1115.69,667.65 1115.69,594.18 v1(1174.69,535.18) ; v1(2258,1142) 2258,1138.75 2241.67,1122.42 C3.2 R3.1
  Bottom Layer w12: v1(1174.69,535.18) 1307.69,535.18 1823.69,1051.18 2178.67,1051.18 2217.19,1089.7 2217.19,1101.19 v1(2258,1142)
NetC4_2: C4.2 R4.1 Y2.1 | length 820.3
  Top Layer w12: Y2.1 1065,388.49 1039.69,363.18 1039.69,187.47 1090.98,136.18 C4.2 1090.98,69.18 1305.02,69.18 1357.02,121.18 R4.1
NetC8_1: C8.1 C10.2 | length 1059.5
  Top Layer w12: v1(537.69,895.18) 564.67,922.16 C10.2 ; v1(1412.69,968.18) 1469.72,968.18 C8.1
  Bottom Layer w12: v1(537.69,895.18) 537.69,890.18 1132.69,890.18 1210.69,968.18 v1(1412.69,968.18)
NetLED2_1: LED2.1 R9.1 | length 168.3
  Top Layer w12: R9.1 2026.02,1467.18 2041,1482.16 LED2.1
NetLED3_1: LED3.1 R10.1 | length 1653.6
  Top Layer w12: LED3.1 1092.69,1074.13 v1(1092.69,967.18) ; v1(2214,1539) 2217.25,1539 2229.43,1551.18 R10.1
  Bottom Layer w12: v1(1092.69,967.18) 1145.69,1020.18 1658.56,1020.18 1810.43,1172.05 1847.05,1172.05 v1(2214,1539)
NetLED4_1: LED4.1 R11.1 | length 1418.2
  Top Layer w12: R11.1 934.69,531.21 934.69,1150.18 971.69,1203.54 1039.69,1271.54 1039.69,1544.13 LED4.1
NetMAX471_6: MAX471.6 R?.2 | length 697.1
  Top Layer w12: MAX471.6 3131.98,169.02 R?.2
NRST: "Power - Burn - UART2 PH.4" C5.1 MCU.14 R5.2 | length 6694.9
  Top Layer w12: -54,578 -54,617.14 -4.37,666.78 -4.37,830.12 26.69,861.18 117.28,861.18 455.02,1198.93 C5.1 ; v1(1191,645) 1191,554.23 1207.69,537.54 1207.69,445.18 1242.69,410.18 1278.69,410.18 ; MCU.14 1178.14,1557.32 1171.83,1551 1139.64,1551 1104,1515.36 1104,1508.36 1087,1491.36 1087,1403.77 1142.69,1348.08 1142.69,849.18 1226.69,765.18 1226.69,462.18 1278.69,410.18 ; R5.2 2966.98,1503.9 2956.69,1514.18 2769.69,1514.18 2495.69,1240.18 2495.69,1124.69 2460.32,1089.32 2460.32,1022.96 2411.54,974.18 2345.18,974.18 2002.91,631.91 2002.91,621.97 2032.86,592.02 2032.86,441.17 2025.24,433.55 1888.09,433.55 1851.29,470.35 1841.35,470.35 1781.18,410.18 1278.69,410.18
  Bottom Layer w12: -54,578 0.2,523.8 0.2,363.67 26.69,337.18 206.34,337.18 513.34,644.18 1190.18,644.18 v1(1191,645)
OSC32_IN: MCU.8 R1.2 | length 965.4
  Top Layer w12: R1.2 1102.63,888.65 1102.63,941.76 1118.86,957.99 1118.86,1223.68 1068,1274.54 1068,1499.23 1085,1516.23 1085,1523.23 1104.32,1542.55 1104.32,1628.26 1107.16,1631.1 1107.16,1651.19 1131.39,1675.43 MCU.8
OSC32_OUT: MCU.9 R2.2 | length 2929.2
  Top Layer w12: MCU.9 1233.95,1655.84 1269.03,1655.84 1342.69,1729.5 1342.69,1770.15 1351.18,1778.64 1351.55,1778.64 1369.83,1796.92 v1(1373.08,1796.92) ; v1(2503.69,2034.18) 3001.69,1536.18 3001.69,1173.18 2934.69,1106.18 2791.67,1106.18 R2.2
  Bottom Layer w12: v1(1373.08,1796.92) 1373.08,1885.29 1358,1900.37 1358,1985.49 1406.69,2034.18 v1(2503.69,2034.18)
OSC_IN: MCU.12 R3.2 | length 2255.7
  Top Layer w12: v1(1153,1576) 1154.06,1576 1174.74,1596.69 MCU.12 ; v1(1681.69,1709.18) 1681.69,1617.11 1687.69,1611.11 1687.69,1503.31 1728.82,1462.18 1790.59,1462.18 1797.62,1455.15 1797.62,1287.38 1827,1258 2023.64,1258 2157.02,1124.63 2157.02,1114.69 2146.68,1104.35 2119.01,1104.35 2082.36,1141 2061.64,1141 2047,1126.36 2047,1105.64 2107.46,1045.18 2115.95,1045.18 2137.11,1024.02 2274.79,1024.02 2305.62,993.18 2403.67,993.18 2425.67,1015.18 R3.2
  Bottom Layer w12: v1(1153,1576) 1214,1637 1393.16,1637 1412.34,1656.18 1628.69,1656.18 v1(1681.69,1709.18)
OSC_OUT: MCU.13 R4.2 | length 2364.5
  Top Layer w12: v1(905.69,572.18) 915.69,582.18 915.69,1173.18 945.69,1203.18 945.69,1382.18 984.69,1421.18 v1(984.69,1464.21) ; MCU.13 1317,1577 v1(1339,1555) ; R4.2 v1(1424.98,319.9)
  Bottom Layer w12: v1(905.69,572.18) 886.69,572.18 844.69,530.18 844.69,453.18 977.98,319.9 v1(1424.98,319.9) ; v1(984.69,1464.21) 1275.21,1464.21 1283.69,1472.69 1283.69,1499.69 v1(1339,1555)
PA2: "Power - Burn - UART2 PH.8" MCU.25 RS.3 | length 2763.7
  Top Layer w12: 46,578 198.69,425.31 198.69,231.18 246.69,183.18 446.69,183.18 498,131.87 RS.3 ; v1(1213.69,1291.54) 1213.69,1340.68 1213.79,1340.78 MCU.25
  Bottom Layer w12: 46,578 -93.31,717.31 -93.31,959.18 -73.31,979.18 199.69,979.18 242.69,1022.18 504.18,1022.18 591.18,1109.18 605.56,1109.18 764.56,1268.18 1190.34,1268.18 v1(1213.69,1291.54)
PA3: "Power - Burn - UART2 PH.7" MCU.26 RS.2 | length 2674.9
  Top Layer w12: 46,478 126.69,397.31 126.69,198.18 166.69,158.18 430.69,158.18 448,140.87 RS.2 448,21.18 481,-11.82 612.69,-11.82 784.69,160.18 784.69,343.18 953.69,512.18 953.69,861.68 960.58,868.57 v1(960.58,1092.42) ; v1(1249.69,1201.18) 1287.69,1201.18 1300.78,1214.27 MCU.26
  Bottom Layer w12: v1(960.58,1092.42) 960.58,1095.67 966,1101.09 966,1113.49 1066.69,1214.18 1150.07,1214.18 1163.07,1201.18 v1(1249.69,1201.18)
PA4: "GPIO-ADC2 IN8,9,14,15 PH.1" MCU.29 | length 2297
  Top Layer w12: MCU.29 1359.83,1389.59 1400.49,1430.25 1430.34,1430.25 1506.69,1506.6 v1(1506.69,1761.99)
  Bottom Layer w12: -54,1352 -10.4,1395.6 174.11,1395.6 523.74,1745.23 1433.57,1745.23 1450.33,1761.99 v1(1506.69,1761.99)
PA5: "GPIO-ADC2 IN8,9,14,15 PH.2" MCU.30 | length 2344.4
  Top Layer w12: -54,1452 -4.18,1402.18 78.69,1402.18 86.52,1394.35 86.52,1238.3 7.48,1159.26 7.48,1003.22 31.22,979.48 87.97,979.48 194.49,1086 v1(244,1086) ; MCU.30 1379.52,1373.92 v1(1403.3,1397.7)
  Bottom Layer w12: v1(244,1086) 501.73,1086 736.1,1320.38 1270.46,1320.38 1295.46,1295.38 1339.89,1295.38 1401.69,1357.18 1401.69,1396.09 v1(1403.3,1397.7)
PA6: "GPIO-ADC2 IN8,9,14,15 PH.3" MCU.31 | length 2203
  Top Layer w12: -54,1552 -5.06,1503.06 324.81,1503.06 365.51,1462.35 365.51,1396.76 351,1382.25 v1(351,1379) ; MCU.31 1399.2,1358.25 1554.69,1513.74 v1(1554.69,1552.18)
  Bottom Layer w12: v1(351,1379) 404.64,1379 492.38,1466.74 653.25,1466.74 718.51,1532 1171.23,1532 1191.41,1552.18 1262.96,1552.18 1309.77,1599 1507.87,1599 v1(1554.69,1552.18)
PA7: "GPIO-ADC2 IN8,9,14,15 PH.4" MCU.32 | length 2263.7
  Top Layer w12: -54,1652 -12.82,1693.18 133.69,1693.18 249.87,1577 348.16,1577 352.16,1581 v1(453.69,1581) ; MCU.32 1418.89,1349.18 1586.69,1516.99 1586.69,1601.64 1550,1638.33 v1(1550,1716)
  Bottom Layer w12: v1(453.69,1581) 507.99,1635.3 507.99,1642.48 572.74,1707.23 1415.04,1707.23 1422.08,1700.18 1530.93,1700.18 1546.75,1716 v1(1550,1716)
PA8: "LED - I2C1 - I2C3 PH.7" MCU.67 | length 3018.3
  Top Layer w12: 48,1020 110.07,1082.07 163.69,1082.07 163.69,1135.69 556.69,1528.69 556.69,1871.18 738.51,2053 1297.2,2053 1370.03,1980.18 1952.82,1980.18 1983,1950 1983,1752.05 1886.69,1655.74 MCU.67
PA13: "Power - Burn - UART2 PH.5" MCU.72 | length 3086.6
  Top Layer w12: v1(345,372) 345,751.5 331.02,765.48 331.02,842.2 345,856.18 345,931.49 433.69,1020.18 624.69,1020.18 665.69,1061.18 665.69,1313.12 655,1323.81 v1(655,1579) ; v1(1737.69,1726.18) 1765.68,1754.17 MCU.72
  Bottom Layer w12: 46,278 47.18,279.18 252.18,279.18 v1(345,372) ; v1(655,1579) 933.06,1579 940.88,1571.18 1045.53,1571.18 1065.71,1551 1163.36,1551 1183.54,1571.18 1215.69,1571.18 1233.69,1589.18 1273.09,1589.18 1301.9,1618 1629.51,1618 v1(1737.69,1726.18)
PA14: "Power - Burn - UART2 PH.6" MCU.76 | length 2787.4
  Top Layer w12: v1(1224.69,874.18) 1224.69,1267.18 1287.54,1330.02 1287.54,1358.05 1378.74,1449.25 1422.47,1449.25 1452,1478.77 1452,1762.49 1526.69,1837.18 1773.22,1837.18 MCU.76
  Bottom Layer w12: 46,378 535.68,867.68 1218.19,867.68 v1(1224.69,874.18)
PB0: "GPIO-ADC2 IN8,9,14,15 PH.5" MAX471.1 MCU.35 | length 7949.1
  Top Layer w12: v1(-6,176) -103.77,176 -126.95,199.18 -137.18,199.18 -171.31,233.31 -171.31,2192.54 -144.66,2219.18 -123.95,2219.18 -109.31,2204.54 -109.31,1675.86 -133.31,1651.86 -133.31,1123.18 46,1302.49 46,1352 ; MCU.35 1477.94,1191.18 1526.13,1143 1619.16,1143 1655.34,1179.18 1676.05,1179.18 1712.17,1143.06 1712.17,874.66 1676.69,839.18 1676.69,517.37 v1(1632.53,473.21)
  Bottom Layer w12: v1(-6,176) -41.7,211.7 -61.12,211.7 -94.52,245.09 -94.52,310.9 -86.9,318.52 -21.09,318.52 4.06,293.36 4.06,262.64 29.22,237.48 182.99,237.48 205.69,260.18 1652.51,260.18 1802.69,110 1945.73,110 ; v1(1632.53,473.21) 1632.53,423.21 1945.73,110 ; MAX471.1 1945.73,110
PB1: "GPIO-ADC2 IN8,9,14,15 PH.6" MAX471.2 MCU.36 | length 4114.2
  Top Layer w12: 46,1452 293.75,1452 310.75,1435 v1(314,1435) ; v1(1605.69,1695.18) 1605.69,1509.12 1561,1464.42 1561,1406.49 1497.63,1343.12 MCU.36 1497.63,1239.18 1574.81,1162 1611.29,1162 1647.47,1198.18 1683.92,1198.18 1731.17,1150.93 1731.17,846.34 1698.69,813.86 v1(1698.69,487.18)
  Bottom Layer w12: v1(314,1435) 423.18,1544.18 513.69,1544.18 624.69,1655.18 876.69,1655.18 915.69,1616.18 1072.15,1616.18 1144.19,1688.23 1407.17,1688.23 1420.21,1675.18 1584.05,1675.18 1604.05,1695.18 v1(1605.69,1695.18) ; v1(1698.69,487.18) 2025.69,160.18 2410.82,160.18 MAX471.2
PB6: "LED - I2C1 - I2C3 PH.5" GYRO.3 MCU.92 | length 3428.2
  Top Layer w12: 48,820 130.51,820 495.69,1185.18 495.69,1217.18 577.69,1299.18 577.69,1858.18 731.51,2012 v1(1098,2012) ; v1(1186,2028) 1188.3,2025.7 1192.3,2025.7 1247.32,1970.68 1289.42,1970.68 1297.86,1979.12 1336.34,1979.12 1363.27,1952.18 1440.26,1952.18 1458.26,1934.18 MCU.92 ; v1(1507.69,2306.18) 1507.69,2838.69 GYRO.3
  Bottom Layer w12: v1(1098,2012) 1114.53,1995.47 1124.47,1995.47 1157,2028 v1(1186,2028) ; v1@1186,2027.38 1186,2032 1186.08,2031.92 1189.92,2031.92 1464.18,2306.18 v1(1507.69,2306.18)
PB7: "LED - I2C1 - I2C3 PH.6" GYRO.4 MCU.93 | length 3230.7
  Top Layer w12: v1(755,1212) 755,1243.42 761.98,1250.4 761.98,1278.57 751.69,1288.86 751.69,1424.18 913.69,1586.18 913.69,1744.69 1157,1988 1203.13,1988 1239.45,1951.68 1314.2,1951.68 1340.69,1925.18 ; 1344.69,1927.18 1433.57,1927.18 1435.57,1925.18 ; MCU.93 1438.57,1922.18 ; GYRO.4 1608.69,2758.31 v1(1608.69,2349.18) ; 1435.57,1925.18 1438.57,1925.18 1438.57,1922.18 ; 1435.57,1925.18 1438.57,1922.18
  Bottom Layer w12: 48,920 336.51,920 400.69,984.18 613.69,984.18 686.69,1057.18 686.69,1143.69 v1(755,1212) ; v1(1314.69,1951.18) 1314.69,1971.18 1484.69,2141.18 1588.69,2141.18 1608.69,2161.18 v1(1608.69,2349.18)
PC4: "GPIO-ADC2 IN8,9,14,15 PH.7" "LM 35.2" MCU.33 | length 4578.3
  Top Layer w12: 46,1552 466.69,1552 478.69,1564 478.69,1603.18 466.69,1615.18 382.69,1615.18 382.69,2169.18 470.69,2257.18 1881.51,2257.18 2339.69,1799 2395.51,1799 ; MCU.33 1438.57,1330.18 v1(1475.57,1367.18)
  Bottom Layer w12: v1(1475.57,1367.18) 1522.57,1414.18 1804.56,1414.18 1843.38,1453 1870.69,1453 2216.69,1799 2395.51,1799
PC5: "GPIO-ADC2 IN8,9,14,15 PH.8" MCU.34 | length 3309.7
  Top Layer w12: MCU.34 1458.26,1146.74 v1(1503,1102)
  Bottom Layer w12: 46,1652 4.82,1693.18 -80.31,1693.18 -112.31,1661.18 -112.31,700.18 4.69,583.18 4.69,559.18 26.69,537.18 155.4,537.18 399.4,781.18 399.4,797.89 526.69,925.18 688.69,925.18 704.69,909.18 983.69,909.18 1048.69,974.18 1048.69,1001.18 1111.69,1064.18 1465.18,1064.18 v1(1503,1102)
PC9: "LED - I2C1 - I2C3 PH.8" MCU.66 | length 2306
  Top Layer w12: 48,1120 47.69,1120 47.69,1103.18 137.66,1103.18 144.69,1110.21 144.69,1143.56 206,1204.87 v1(206,1301) ; MCU.66 1929.81,1636.06 1934.75,1641 v1(1938,1641)
  Bottom Layer w12: v1(206,1301) 259,1354 656.64,1354 680.64,1378 1272.51,1378 1365.69,1471.18 1589.69,1471.18 1743.51,1625 1831.13,1625 1847.13,1641 v1(1938,1641)
PD12: "LED - I2C1 - I2C3 PH.1" LED1.1 MCU.59 | length 4205.2
  Top Layer w12: v1(441,914) 441,910.87 639.75,712.13 ; v1(575,730) 578.25,730 596.12,712.13 639.75,712.13 ; LED1.1 639.75,712.13 ; MCU.59 1955.49,1498.26 1969.75,1484 v1(1973,1484)
  Bottom Layer w12: -52,820 -11.18,779.18 306.18,779.18 v1(441,914) ; v1(575,730) 686.18,841.18 1357.69,841.18 1437.69,921.18 1437.69,983.18 1426.69,994.18 1182.69,994.18 1130.69,942.18 1067.69,942.18 1067.69,992.18 1117.69,1042.18 1653.69,1042.18 2165.69,1554.18 2165.69,1602.54 2151.05,1617.18 2106.18,1617.18 v1(1973,1484)
PD13: "LED - I2C1 - I2C3 PH.2" MCU.60 R9.2 | length 3307.8
  Top Layer w12: v1(1691,1363) 1688.7,1365.3 1671,1365.3 1656.69,1379.61 1656.69,1719.54 1671.34,1734.18 1692.05,1734.18 1717.69,1708.54 1717.69,1507.83 1743.34,1482.18 1770.25,1482.18 1805.92,1517.85 1840.05,1517.85 MCU.60 ; v1(1845,1289) 2027.51,1289 2093.98,1355.47 R9.2
  Bottom Layer w12: -52,920 -11.18,879.18 346.69,879.18 414.69,947.18 881.69,947.18 1040.81,1106.3 1311.67,1106.3 1362.56,1157.18 1364.13,1157.18 1583.13,1376.18 1628.85,1376.18 1642.03,1363 v1(1691,1363) 1691,1330.21 1698.03,1323.18 1828.27,1323.18 1842.7,1308.75 1842.7,1291.3 v1(1845,1289)
PD14: "LED - I2C1 - I2C3 PH.3" MCU.61 R10.2 | length 2839.2
  Top Layer w12: v1(1753.69,1507.18) 1784.14,1537.63 MCU.61 1900.14,1537.63 1951.69,1589.18 2080.69,1589.18 2184.69,1485.18 2384.67,1485.18 2444.67,1545.18 R10.2
  Bottom Layer w12: -52,1020 -2.82,1069.18 66.69,1069.18 91.69,1094.18 91.69,1150.18 94.69,1153.18 482.69,1153.18 688.51,1359 1280.38,1359 1373.56,1452.18 1597.56,1452.18 1606.38,1461 1707.51,1461 v1(1753.69,1507.18)
PD15: "LED - I2C1 - I2C3 PH.4" MCU.62 R11.2 | length 4164.9
  Top Layer w12: -52,1120 -95.31,1076.69 -95.31,559.18 -73.31,537.18 -33.31,537.18 -13.31,557.18 -13.31,615.18 6.69,635.18 86.69,635.18 143.69,578.18 143.69,509.18 253.69,399.18 253.69,281.18 320.69,214.18 717.67,214.18 744.67,241.18 R11.2 ; v1(1754,1669) 1754,1609.33 1805.92,1557.41 1840.05,1557.41 MCU.62
  Bottom Layer w12: -52,1120 554.23,1726.23 1511.46,1726.23 1536.41,1751.18 1762.69,1751.18 1770,1743.87 1770,1716.06 1754,1700.06 v1(1754,1669)
PE9: "Servo PH.3" MCU.40 | length 2226.7
  Top Layer w12: v1(997,1010) 997,931.28 984.37,918.65 984.37,843.18 972.69,831.5 972.69,602.18 990.69,584.18 990.69,121.18 987.69,118.18 987.69,-1.82 1090.87,-105 1400,-105 ; MCU.40 1576.37,1206.88 1582,1201.25 v1(1582,1198)
  Bottom Layer w12: v1(997,1010) 1070.18,1083.18 1319.36,1083.18 1363.18,1127 1511,1127 v1(1582,1198)
"RD + (OBC-ADCS)": EUTS?.21 R25.1 RS.5 | length 4015.1
  Top Layer w12: RS.5 548,314.18 869.69,635.87 ; R25.1 869.69,771.02 869.69,635.87 ; v1(869.69,510.18) 869.69,635.87
  Bottom Layer w12: v1(869.69,510.18) 1526.36,510.18 1788.36,772.18 2523.18,772.18 3241.69,1490.69 3241.69,1799.97 3248.72,1807 3333,1807 3369.5,1843.5 EUTS?.21
"RD + (OBC-COMM)": EUTS?.41
"RD + (OBC-EPS)": EUTS?.01
"RD - (OBC-ADCS)": EUTS?.19 R25.2 RS.6 | length 4105.1
  Top Layer w12: RS.6 498,428.8 788.69,719.49 788.69,801.18 826.49,838.98 R25.2 869,1101.49 v1(869.69,1102.18)
  Bottom Layer w12: v1(869.69,1102.18) 816.69,1155.18 816.69,1203.18 852.69,1239.18 1389.69,1239.18 1420.69,1270.18 1420.69,1369.18 1484.69,1433.18 1706.56,1433.18 1731.38,1458 1821.51,1458 2367.51,2004 3309,2004 EUTS?.19@3369.5,1943.5
"RD - (OBC-COMM)": EUTS?.39
"RD - (OBC-EPS)": EUTS?.02
"RST Soft-Reset": EUTS?.25
"Solar Array Input": EUTS?.24
"TD + (OBC-ADCS)": EUTS?.17 R26.1 RS.8 | length 5784.6
  Top Layer w12: RS.8 398,584.57 418,604.57 v1(418,607) ; v1(1253.53,751.02) R26.1 1483.69,751.02 1632.69,602.02 v1(1632.69,573.18) ; v1(3118,515) 3118,1189.99 3143.32,1215.31 3143.32,1982.97 3156.32,1995.97 3298.56,1995.97 3333.97,1960.55 3333.97,1851.45 3298.56,1816.03 3265.44,1816.03 3259,1822.47 3249.06,1822.47 3242.03,1815.44 3242.03,1704.84 3253.2,1693.67 3263.15,1693.67 3265.44,1695.97 3398.56,1695.97 3403.52,1691 3414.51,1691 3422.69,1699.18 3422.69,1990.31 EUTS?.17@3382,2031
  Bottom Layer w12: v1(418,607) 449.29,607 521.3,679.01 1181.52,679.01 v1(1253.53,751.02) ; v1(1632.69,573.18) 1690.87,515 v1(3118,515)
"TD + (OBC-COMM)": EUTS?.37
"TD + (OBC-EPS)": EUTS?.03
"TD - (OBC-ADCS)": EUTS?.15 R26.2 RS.7 | length 4114.4
  Top Layer w12: RS.7 448,485.49 v1(520.69,558.18) ; R26.2 1444.98,816 v1(1520,816)
  Bottom Layer w12: v1(520.69,558.18) 560.16,597.65 1301.65,597.65 v1(1520,816) 1520,846.15 1826.9,1153.05 1854.92,1153.05 1868.87,1167 2509.51,1167 3252.51,1910 3415.66,1910 3422.69,1917.03 3422.69,2090.31 EUTS?.15@3382,2131
"TD - (OBC-COMM)": EUTS?.35
"TD - (OBC-EPS)": EUTS?.04
"UART-Rx (OBC-CAM)": EUTS?.38
"UART-Tx (OBC-CAM)": EUTS?.36
VBAT: C12.1 MCU.6 R14.2 | length 6761.2
  Top Layer w12: v1(-131.31,168.18) -101.31,138.18 235.69,138.18 520.69,-146.82 1726.69,-146.82 1781.02,-92.49 C12.1 ; R14.2 786.98,1425.47 963.69,1602.18 1051.37,1602.18 1085.86,1636.67 1085.86,1656.76 1143.89,1714.8 1190.69,1714.8 ; v1(1151,1855) 1190.69,1815.31 1190.69,1714.8 ; MCU.6 1190.69,1714.8
  Bottom Layer w12: v1(-131.31,168.18) -131.31,2121.18 -117.08,2135.41 917.46,2135.41 1151,1901.87 v1(1151,1855)
VBAT+: EUTS?.49 EUTS?.51 | length 100
  Top Layer w12: EUTS?.51@3382,331 EUTS?.49@3382,431
VCAP_1: C34.2 C35.2 MCU.49 | length 1078.8
  Top Layer w12: MCU.49 1753.53,826.41 1726.69,799.56 1726.69,536.16 1806.86,536.16 1813.89,543.19 1813.89,572.89 1791.31,595.47 1791.31,625.17 1856.11,689.98 C35.2
VCAP_2: C32.2 C33.2 MCU.73 | length 1854.2
  Top Layer w12: C32.2 C33.2 1637.67,536.16 1657.69,556.18 1657.69,850.9 1693.17,886.37 1693.17,1126.71 v1(1665.69,1154.18) ; v1(1608,1351.18) 1607.34,1351.84 1607.34,1381.18 1598,1390.52 1598,1416.62 1636.89,1455.51 1636.89,1755.95 1654.8,1773.85 MCU.73
  Bottom Layer w12: v1(1608,1351.18) 1608,1289.9 1598,1279.9 1598,1221.87 v1(1665.69,1154.18)
VDDA: C8.2 C9.2 Inductor.1 MCU.22 R13.2 | length 4669.3
  Top Layer w12: Inductor.1 453,1961.18 571.82,2080 1417.69,2080 ; v1(1418.63,2009.18) 1417.69,2010.11 1417.69,2080 ; v1(1426.56,1800.44) 1426.56,1645.14 1433,1638.7 1433,1486.64 1414.6,1468.25 1367.76,1468.25 1299.35,1399.84 MCU.22 1188.69,1399.84 1188.69,870.18 1210.69,848.18 1278.67,848.18 1354.67,924.18 C9.2 1354.67,1001.18 1365.67,1012.18 1526.69,1012.18 1537.67,1001.21 C8.2 ; R13.2 2664.67,1601.18 2643.67,1622.18 2376.69,1622.18 1918.87,2080 1417.69,2080
  Bottom Layer w12: v1(1418.63,2009.18) 1449,1978.81 1449,1822.88 v1(1426.56,1800.44)
VREF+: C10.1 C11.1 MCU.21 R13.1 | length 3584.2
  Top Layer w12: C10.1 496.72,897.12 523.65,870.18 732.35,870.18 830.02,967.85 v1(830,1005) ; v1(830,1005) C11.1 ; C11.1 830.02,1329.27 v1(912.94,1412.18) ; MCU.21 1275.03,1419.52 1328.12,1472.61 1328.12,1479.99 1337.38,1489.25 v1(1337.38,1492.49) ; v1(2140.69,1592.18) 2555.72,1592.18 R13.1
  Bottom Layer w12: v1(830,1005) 867.06,1005 870.88,1001.18 904.69,1001.18 1044.51,1141 1319.5,1141 1354.69,1176.18 1356.26,1176.18 1575.26,1395.18 1812.43,1395.18 1827.25,1410 1958.51,1410 v1(2140.69,1592.18) ; v1(912.94,1412.18) 1021.18,1412.18 1036.36,1397 1252.51,1397 1328.12,1472.61 1328.12,1479.99 1337.38,1489.25 v1(1337.38,1492.49)
pads on no net: EUTS?.05 EUTS?.07 EUTS?.09 EUTS?.13 EUTS?.14 EUTS?.23 EUTS?.26 EUTS?.27 EUTS?.33 EUTS?.34 EUTS?.40 EUTS?.43 EUTS?.44 EUTS?.47 EUTS?.48 GYRO.5 GYRO.6 GYRO.7 GYRO.8 GYRO.9 GYRO.10 MCU.1 MCU.2 MCU.3 MCU.4 MCU.5 MCU.7 MCU.15 MCU.16 MCU.17 MCU.18 MCU.23 MCU.24 MCU.37 MCU.38 MCU.39 MCU.41 MCU.42 MCU.43 MCU.44 MCU.45 MCU.46 MCU.47 MCU.48 MCU.51 MCU.52 MCU.53 MCU.54 MCU.55 MCU.56 MCU.57 MCU.58 MCU.63 MCU.64 MCU.65 MCU.68 MCU.69 MCU.70 MCU.71 MCU.77 MCU.78 MCU.79 MCU.80 MCU.81 MCU.82 MCU.83 MCU.84 MCU.85 MCU.86 MCU.87 MCU.88 MCU.89 MCU.90 MCU.91 MCU.95 MCU.96 MCU.97 MCU.98

## Polygon pours and split planes (outlines as drawn)
G on Ground (split plane): 175 vertices, not listed, extent -173.26,-178.78 3544.52,3336.26
"3.3v (ADCS)" on Power (split plane): 175 vertices, not listed, extent -173.26,-178.78 3544.52,3336.26

## Silkscreen, mask and mechanical layers (free items; w line width, h text height)
Top Overlay:
  text "ADCS BOARD" at 446,2977 h60
  text "AL AZHAR UNIVERSITY" at 209,2860 h60
  text "+" at 2034,1491.67 h20
  text "+" at 1031,1481.67 h20
  text "+" at 1059.69,1015.85 h20
  text "+" at 1934,945.67 h20
  text "+" at 691,648.67 h20
Mechanical 1:
  lines w10: -193.31,-120.08 ccw(c-153.94,-120.08) -153.94,-159.45 114.17,-159.45 cw(c114.17,-223.13) 159.2,-178.1 161.27,-180.17 ccw(c206.3,-135.14) 206.3,-198.82 2272.83,-198.82 ccw(c2272.83,-150.82) 2306.78,-184.76 2368.42,-123.11 cw(c2402.36,-157.05) 2402.36,-109.06 3525.2,-109.05 ccw(c3525.2,-69.68) 3564.57,-69.68 3564.57,285.43 ccw(c3513.72,285.43) 3549.67,321.39 3528.54,342.52 3502.04,369.03 cw(c3532.62,399.61) 3489.37,399.61 3489.37,2671.26 cw(c3582.52,2671.26) 3516.65,2737.12 3535.32,2755.79 ccw(c3469.45,2821.65) 3562.6,2821.65 3562.6,3131.5 ccw(c3523.23,3131.5) 3523.23,3170.87 3218.5,3170.87 cw(c3218.5,3276.37) 3143.9,3201.77 3020.27,3325.4 ccw(c2945.67,3250.8) 2945.67,3356.3 292.91,3356.3 287.48,3356.3 ccw(c287.48,3289.09) 239.96,3336.61 cw(c192.44,3384.14) 192.44,3316.93 187.01,3316.93 -153.94,3316.93 ccw(c-153.94,3277.56) -193.31,3277.56 -193.31,-120.08

## Text inside footprints (layer, text, board x,y; h text height)
MAX471: Top Overlay "GND" at 2636,165 h20.63; Top Overlay "GND" at 2541,160 h20.63; Top Overlay "AT" at 2451,155 h20.63; Top Overlay "VT" at 2351,160 h20.63; Top Overlay "GND" at 2836,710 h20.63; Top Overlay "Vout" at 2631,705 h20.63; Top Overlay "GND" at 2331,700 h20.63; Top Overlay "Vin" at 2136,705 h20.63